# Altium PCB ADC-PCB.PcbDoc (part 2 of 2)
Units mil, origin at the board's own origin, x right, y up, seen from the top; angles counter-clockwise.
Board outline 3937.01 x 3937.01 mil, 2 copper layers (Top Layer, Bottom Layer); 145 components, 173 nets, 727 pads, 175 vias.
Unrouted connection lines stored in the file: 3.
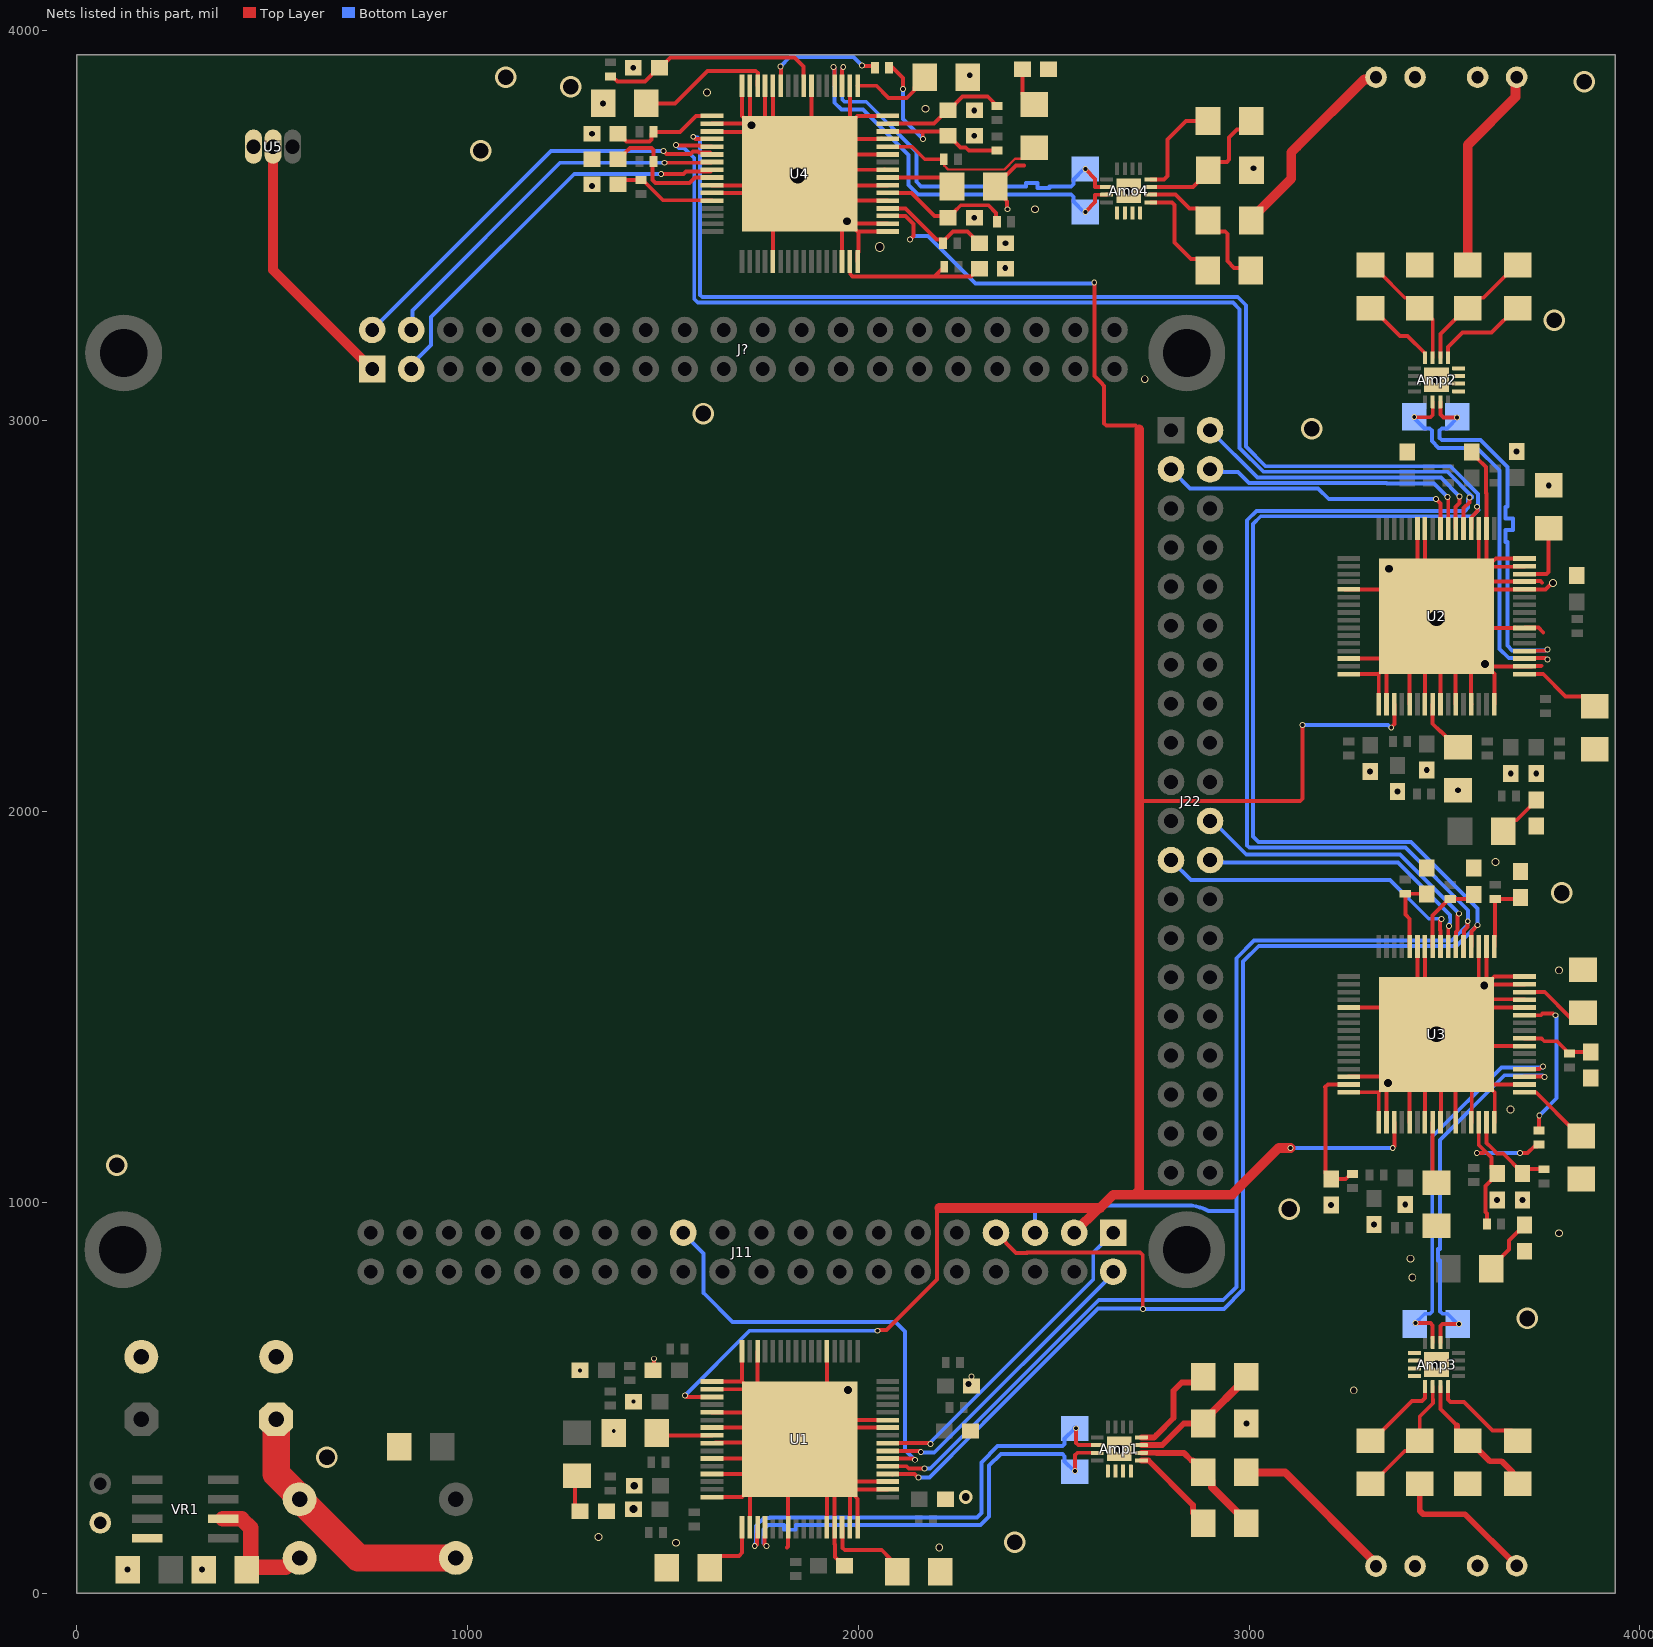
[diagram p2: the nets of this part, all layers, seen from the top]

## Via types
v1: diameter 15, hole 10, Top Layer to Bottom Layer, 98 vias
v2: diameter 20, hole 15, Top Layer to Bottom Layer, 43 vias
v3: diameter 55, hole 40, Top Layer to Bottom Layer, 16 vias
v4: diameter 35, hole 20, Top Layer to Bottom Layer, 12 vias
v5: diameter 25, hole 20, Top Layer to Bottom Layer, 3 vias
v6: diameter 30, hole 15, Top Layer to Bottom Layer, 1 vias
v7: diameter 50, hole 25, Top Layer to Bottom Layer, 1 vias
v8: diameter 20, hole 10, Top Layer to Bottom Layer, 1 vias

## Nets (pads, with @x,y where several pads share a name; then routed paths per layer and width w, separated by ;. In a path a pad name is that pad's centre, name@x,y a point inside that pad or via, vN(x,y) a via of type N, cw(c..) or ccw(c..) an arc to the next point about the centre after c; other vN are vias at no path point) (continued)
AD3-PIN14: C34.1 L26.1 L33.1 U3.14 | length 484.7
  Top Layer w10: v1(3583,1126) 3583.96,1126.96 3600.27,1126.96 3604.16,1130.84 ; U3.14@3588,1205 3588,1147 3604.16,1130.84 ; L26.1@3608.78,945 3608.78,971.22 3605,975 3605,1041.5 3635,1071.5 C34.1@3635,1073.46 3620.31,1088.15 3620.31,1114.69 3604.16,1130.84 ; v1(3694,1126) 3713,1126 3729.96,1142.96 3736.96,1142.96 L33.1@3742,1148
  Bottom Layer w10: v1(3583,1126) v1(3694,1126)
AD3-PIN15: C33.1 L25.1 U3.15 | length 238.5
  Top Layer w10: U3.15@3608,1205 3608,1152 3620,1140 3635.21,1124.79 3650.65,1124.79 3700,1075.43 C33.1@3700,1073.46 3711.54,1085 L25.1@3755,1085
AD3-PIN24: C39.1 L31.1 U3.24 | length 190.2
  Top Layer w10: U3.24@3705,1420 3748.18,1420 3755.68,1412.5 3788.72,1412.5 3810.63,1390.59 3810.63,1386.26 3815.67,1381.22 L31.1@3820,1381.22 3823.78,1385 C39.1@3875,1385
AD3-PIN27: L33.2 U3.27 | length 397.9
  Top Layer w10: U3.27@3705,1479 U3.27@3705,1479 3747.23,1479.05 3751.68,1483.5 3778.33,1483.5 3782.74,1479.09 v1(3784.09,1479.09) ; L33.2@3742,1184.22 3742,1207 3742.04,1207.04 3742.04,1221.04 v1(3743,1222)
  Bottom Layer w10: v1(3743,1222) 3787.5,1266.5 3787.5,1475.68 v1(3784.09,1479.09)
AD3-PIN33: C36.1 L28.1 U3.33 | length 219.7
  Top Layer w10: U3.33@3629,1656 U3.33@3628,1655 3628,1678 3630,1680 L28.1@3630,1776.89 3683.11,1776.89 3695,1765 C36.1@3695,1780 3686.54,1780 C36.1@3685,1778.46
AD3-PIN41: C40.1 L32.1 U3.41 | length 207.5
  Top Layer w10: U3.41@3470,1655 3470,1734.82 3483.68,1748.5 3505.63,1770.45 3505.63,1771.18 3510.67,1776.22 3562.68,1776.22 C40.1@3575,1788.54
AD3-PIN44: C37.1 L29.1 U3.44 | length 195.7
  Top Layer w10: U3.44@3411,1655 3411,1674 3410,1675 3411,1676 3411,1725.98 3400,1736.98 L29.1@3400,1790 3454.29,1790 C37.1@3455,1789.29
AD3-PIN63: C38.1 L30.1 U3.63 | length 364.5
  Top Layer w10: U3.63@3255,1302 3202,1302 3195,1295 3195.31,1294.69 3195.31,1074.69 C38.1@3210,1060 3247.56,1060 3260.67,1073.11 L30.1@3265,1073.11
AD4-PIN4: C44.1 L35.1 U4.4 | length 298
  Top Layer w10: U4.4@2075.39,3544 2121,3544 2200,3465 2210,3465 2210.63,3464.37 2211.85,3464.37 L35.1@2216.89,3459.33 ; L35.1@2216.89,3455 L35.1@2216.89,3459.33 ; C44.1@2310,3455 2308.03,3455 2293.35,3469.69 2293.35,3471.32 2279.67,3485 2242.56,3485 L35.1@2216.89,3459.33
AD4-PIN6: C47.1 L38.1 U4.6 | length 349.8
  Top Layer w10: U4.6@2075.39,3584 2136,3584 2195,3525 2225,3525 C47.1@2230,3520 2231.97,3520 2246.65,3534.69 2246.65,3536.65 2262.21,3552.21 2332.79,3552.21 2352.19,3532.81 2352.19,3512.81 L38.1@2355,3510
AD4-PIN12: L34.1 R30.2 U4.12 | length 425.6
  Top Layer w6: L34.1@2220,3660 2220,3653.51 2229.66,3643.85 2373.85,3643.85 2401.27,3671.27 2431.27,3671.27 R30.2@2450,3690
  Top Layer w10: U4.12@2075.39,3702 2138,3702 2170,3670 2215,3670 L34.1@2216.89,3671.89 ; L34.1@2218.78,3670 2220,3668.78 L34.1@2220,3660
AD4-PIN14: C46.1 L37.1 L44.1 U4.14 | length 544.5
  Top Layer w10: U4.14@2075.39,3741 2164,3741 ; L44.1@2079,3904 2080,3905 2088,3905 2114.75,3878.25 v1(2114.75,3849.5) ; v1(2166,3722) 2165.04,3722.96 2165.04,3739.96 2164,3741 ; L37.1@2355,3691.89 2283.11,3691.89 2275,3700 2261.97,3700 2231.97,3730 C46.1@2230,3730 2219,3741 2164,3741
  Bottom Layer w10: v1(2114.75,3849.5) 2114.75,3773.25 v1(2166,3722)
AD4-PIN15: C45.1 L36.1 U4.15 | length 318.9
  Top Layer w10: U4.15@2075.39,3761 2089,3761 2090,3760 2091,3761 2194.03,3761 2228.03,3795 C45.1@2230,3795 2231.97,3795 2266.97,3830 2331.22,3830 L36.1@2355,3806.22
AD4-PIN24: C51.1 L42.1 U4.24 | length 584.5
  Top Layer w10: L42.1@1366,3882 1370.33,3882 1383.33,3869 1453.96,3869 1488.96,3904 1492.9,3904 1518.9,3930 1837.14,3930 1860,3907.14 1860,3882 1861,3882 1860.39,3881.39 U4.24@1860.39,3858
AD4-PIN27: L44.2 U4.27 | length 293.4
  Top Layer w10: v1(1801,3907.5) 1801.82,3906.68 U4.27@1801.82,3885.5 ; U4.27@1801.39,3858 1801.39,3862 U4.27@1802.39,3863 ; v1(2009,3910) 2009.96,3909.04 2037.74,3909.04 L44.2@2042.78,3904 L44.2@2040.78,3902
  Bottom Layer w10: v1(1801,3907.5) 1824.65,3931.15 1987.85,3931.15 v1(2009,3910)
AD4-PIN33: C48.1 L39.1 U4.33 | length 284.3
  Top Layer w10: C48.1@1385,3735 1386.97,3735 1406.99,3714.98 1465.32,3714.98 1471.18,3720.83 1471.18,3734.96 L39.1@1476.22,3740 1544,3740 1585,3781 U4.33@1625.39,3781
AD4-PIN41: C52.1 L43.1 U4.41 | length 344.5
  Top Layer w10: C52.1@1385,3670 1386.97,3670 1401.65,3684.69 1401.65,3685.34 1415.31,3699 1470.36,3699 1476.22,3693.14 1476.22,3660.04 1473,3656.82 1473,3617.18 1480.68,3609.5 1568.32,3609.5 1581.82,3623 U4.41@1625.39,3623
AD4-PIN44: C49.1 L40.1 U4.44 | length 267
  Top Layer w10: C49.1@1384.93,3606 1387,3606 1398,3617 1448.33,3617 1500.33,3565 1624.39,3565 U4.44@1625.39,3564
AD4-PIN63: C50.1 L41.1 U4.63 | length 409.2
  Top Layer w10: U4.63@1978.39,3408 1979.39,3407 1979.39,3375.86 1985.25,3370 2195,3370 ; L41.1@2220,3395 2195,3370 ; C50.1@2310,3390 2308.03,3390 2288.03,3370 2195,3370
CS-1: J11.1 U1.40 | length 844.6
  Top Layer w10: U1.40@2075.39,383.7 2183.3,383.7 v1(2185,382)
  Bottom Layer w10: v1(2185,382) 2185,386.06 2601.34,802.4 2601.34,871.7 2623.34,893.7 J11.1@2652.34,922.7
CS-2: J22.3 U2.40 | length 790.1
  Top Layer w10: v1(3479,2800) 3489.79,2789.21 3489.79,2725.21 U2.40@3490,2725
  Bottom Layer w10: J22.3@2800.34,2876.2 2806,2870.54 2806,2870 2806.54,2870 2849.34,2827.2 3176.97,2827.2 3204.17,2800 v1(3479,2800)
CS-3: J22.23 U3.40 | length 828
  Top Layer w10: U3.40@3490,1655 3490,1696.68 3489,1697.68 3489,1720.65 3492.62,1724.27 v1(3492.62,1725.62)
  Bottom Layer w10: J22.23@2800.34,1876.2 2801.8,1876.2 2802,1876 2802,1874.54 2851.34,1825.2 3360.8,1825.2 3460,1726 3492.24,1726 v1(3492.62,1725.62)
CS-4: J?.3 U4.40 | length 1028.8
  Top Layer w10: v1(1495.5,3632) 1552.35,3632 1559.35,3639 1621.39,3639 U4.40@1625.39,3643
  Bottom Layer w10: J?.3@855.64,3133 855.64,3143.64 906.64,3194.64 906.64,3265.64 1273,3632 v1(1495.5,3632)
DRDY-1: J11.23 U1.38 | length 1145.4
  Top Layer w10: U1.38@2075.39,344.7 2140.15,344.7 2143.65,341.2 v1(2145,341.2)
  Bottom Layer w10: J11.23@1552.34,922.7 1557.3,922.7 1562,918 1562,911 1601.07,871.93 1604,869 1604,830.72 ccw(c1652.34,822.7) 1604,814.68 1604,768 1606.93,765.07 1678,694 2095.14,694 2119.59,669.55 2119.59,366.61 v1(2145,341.2)
DRDY-2: J22.2 U2.38 | length 794.9
  Top Layer w10: U2.38@3529,2725 3529,2780 3539,2790 v1(3539,2807)
  Bottom Layer w10: J22.2@2900.34,2976.2 3021.47,2855.07 3490.93,2855.07 v1(3539,2807)
DRDY-3: J22.22 U3.38 | length 824
  Top Layer w10: U3.38@3529,1655 3530,1656 3530,1692.68 3534,1696.68 3534,1734.3 3537.27,1737.56 v1(3537.27,1738.91)
  Bottom Layer w10: J22.22@2900.34,1976.2 2907.8,1976.2 2923,1961 2922.52,1960.52 2993,1890 3386.94,1890 3537.27,1739.68 v1(3537.27,1738.91)
DRDY-4: J?.2 U4.38 | length 1073.9
  Top Layer w10: v1(1501.5,3691) 1502,3691 1509.5,3683.5 1570.5,3683.5 1576.58,3689.58 1590.17,3689.58 1592.69,3687.06 1620.33,3687.06 U4.38@1625.39,3682
  Bottom Layer w10: J?.2@755.64,3233 755.64,3242.64 756,3243 765.64,3243 1213.64,3691 v1(1501.5,3691)
ds1820: J?.1 U5.2 | length 674.1
  Top Layer w25: U5.2@502,3702.07 502,3386.64 J?.1@755.64,3133
GND: Amo4.13 Amo4.14 Amo4.15 Amo4.16 Amo4.17 Amp1.13 Amp1.14 Amp1.15 Amp1.16 Amp1.17 Amp2.13 Amp2.14 Amp2.15 Amp2.16 Amp2.17 Amp3.13 Amp3.14 Amp3.15 Amp3.16 Amp3.17 C1.b C2.b C3.1 C4.1 C5.2 C6.2 C7.2 C8.2 C9.2 C10.2 C11.2 C12.2 C13.2 C14.2 C15.2 C16.2 C17.2 C18.1 C19.2 C20.2 C21.2 C22.2 C23.2 C24.2 C25.2 C26.2 C27.2 C28.1 C29.2 C30.1 C31.1 C32.2 C33.2 C34.2 C35.2 C36.2 C37.2 C38.2 C39.2 C40.2 C41.2 C42.1 C43.1 C44.2 C45.2 C46.2 C47.2 C48.2 C49.2 C50.2 C51.2 C52.2 C53.2 J1.1 J2.1 J3.1 J4.1 J5.1 R2.1 R6.2 R13.1 R15.2 R20.1 R25.1 R27.2 R29.2 U1.1 U1.2 U1.5 U1.7 U1.9 U1.11 U1.13 U1.16 U1.18 U1.23 U1.28 U1.29 U1.31 U1.32 U1.34 U1.35 U1.42 U1.43 U1.53 U1.62 U1.64 U1.65 U2.1 U2.2 U2.5 U2.7 U2.9 U2.11 U2.13 U2.16 U2.18 U2.23 U2.28 U2.29 U2.31 U2.32 U2.34 U2.35 U2.42 U2.43 U2.53 U2.62 U2.64 U2.65 U3.1 U3.2 U3.5 U3.7 U3.9 U3.11 U3.13 U3.16 U3.18 U3.23 U3.28 U3.29 U3.31 U3.32 U3.34 U3.35 U3.42 U3.43 U3.53 U3.62 U3.64 U3.65 U4.1 U4.2 U4.5 U4.7 U4.9 U4.11 U4.13 U4.16 U4.18 U4.23 U4.28 U4.29 U4.31 U4.32 U4.34 U4.35 U4.42 U4.43 U4.53 U4.62 U4.64 U4.65 U5.1 VR1.4 | length 15419
  Top Layer w10: C3.1@1374.02,410 v1(1374.02,415) ; C12.2@1475,570 1477,572 v1(1477,600) ; U1.16@1625.39,245.7 1644,245.7 1645,246.7 1646,245.7 1702.39,245.7 U1.65@1720,263.31 ; U1.13@1625.39,304.7 1720,304.7 U1.65@1760,344.7 ; U1.11@1625.39,344.7 U1.65@1760,344.7 ; U1.9@1625.39,383.7 1634,383.7 1635,384.7 1635,385 U1.65@1841.69,385 ; U1.7@1625.39,423.7 U1.65@1751.3,423.7 ; U1.5@1625.39,462.7 1707.89,462.7 1710,464.81 1710,465 U1.65@1751.3,423.7 ; U1.2@1625.39,521.7 U1.65@1722.39,521.7 ; U1.1@1625.39,541.7 1702.39,541.7 ; U4.43@1625.39,3584 U4.65@1801.39,3584 ; U4.42@1625.39,3603 U4.65@1820.39,3603 ; U4.35@1625.39,3741 1626.39,3740 U4.65@1743.39,3740 ; U4.34@1625.39,3761 U4.65@1722.39,3761 ; U1.64@1702.39,618.7 1702.39,541.7 ; U4.32@1702.39,3858 1702.39,3781 U4.65@1722.39,3761 ; U1.18@1722.39,168.7 1722.39,247.61 1720,250 U1.65@1720,263.31 ; U4.31@1722.39,3858 1722.39,3845.61 1723,3845 1722.39,3844.39 U4.65@1722.39,3761 ; U1.65@1740,504.09 U1.65@1722.39,521.7 ; U1.62@1742.39,618.7 1742.39,501.7 U1.65@1850.39,393.7 ; U4.29@1761.39,3858 U4.65@1761.39,3722 ; U4.53@1781.39,3408 1781.39,3425.39 1782,3426 1781.39,3426.61 1781.39,3564 U4.65@1801.39,3584 ; U4.28@1781.39,3858 U4.65@1781.39,3702 ; 1818,117 1820.39,119.39 1820.39,144.7 1820.09,145 1820,145 1820.39,145.39 U1.23@1820.39,168.7 1820.39,280 1850.39,310 U1.65@1850.39,393.7 ; U4.23@1880.39,3858 U4.65@1880.39,3663 ; U1.28@1919.39,168.7 U1.65@1919.39,324.7 ; U1.53@1919.39,618.7 1919.39,462.7 U1.65@1899.39,442.7 ; U4.65@1956,3527.39 U4.65@1919.39,3564 ; U4.62@1958.39,3408 U4.65@1958.39,3525 ; C13.2@1965,70 1963.03,70 1940.71,92.32 1940.71,124.38 1939.39,125.7 U1.29@1939.39,168.7 1939.39,184.39 1940,185 1939.39,185.61 U1.65@1939.39,304.7 ; U1.31@1978.39,168.7 U1.65@1978.39,265.7 ; U4.18@1978.39,3858 U4.65@1978.39,3761 ; U1.32@1998.39,168.7 1998.39,241.61 1990,250 1990,254.09 U1.65@1978.39,265.7 ; U4.64@1998.39,3408 1998.39,3431 2000,3432.61 2000,3483.39 ; U1.34@2075.39,265.7 U1.65@1978.39,265.7 ; U1.35@2075.39,285.7 2055.7,285.7 2055,285 2054.3,285.7 U1.65@1958.39,285.7 ; U1.42@2075.39,423.7 U1.65@1880.39,423.7 ; U1.43@2075.39,442.7 U1.65@1899.39,442.7 ; U4.1@2075.39,3485 1998.39,3485 U4.65@1978.39,3505 ; U4.2@2075.39,3505 U4.65@1978.39,3505 ; U4.5@2075.39,3564 U4.65@1919.39,3564 ; U4.7@2075.39,3603 2061,3603 2060,3604 2059,3603 U4.65@1880.39,3603 ; U4.9@2075.39,3643 2068,3643 2067,3644 2066,3643 U4.65@1860.39,3643 ; U4.11@2075.39,3682 U4.65@1899.39,3682 ; U4.13@2075.39,3722 2060,3722 2059,3723 2058,3722 U4.65@1939.39,3722 ; U4.16@2075.39,3781 1998.39,3781 U4.65@1978.39,3761 ; C14.2@2277,405.07 C14.2@2286.93,415 ; C11.2@2290,530 v1(2290,554) ; v1(2382,3542) 2381.04,3542.96 2381.04,3561.96 2376.61,3566.39 2376.61,3569.57 2372.18,3574 2369,3574 2350.12,3592.88 C42.1@2350.12,3600 2350.12,3603.94 2376.61,3630.43 2380.55,3630.43 2404.12,3654 2424,3654 ; U2.53@3245,2568 3246,2569 U2.53@3255,2569 3411,2569 U2.65@3431,2549 ; U3.64@3255,1282 3332,1282 ; U3.62@3255,1322 U3.65@3372,1322 ; U3.53@3255,1499 3411,1499 U3.65@3431,1479 ; U2.64@3255,2352 3332,2352 ; U2.62@3255,2392 U2.65@3372,2392 ; U3.1@3332,1205 3332,1282 ; U2.1@3332,2275 3332,2352 ; U3.2@3352,1205 U3.65@3352,1302 ; U2.2@3352,2275 U2.65@3352,2372 ; U3.65@3374,1324 U3.65@3411,1361 ; U3.5@3411,1205 U3.65@3411,1361 ; U2.5@3411,2275 U2.65@3411,2431 ; U3.43@3431,1655 U3.65@3431,1479 ; U2.43@3431,2725 U2.65@3431,2549 ; U3.7@3450,1205 U3.65@3450,1400 ; U3.42@3450,1655 U3.65@3450,1460 ; U2.7@3450,2275 3450,2357.5 3449.5,2358 3449,2358 3480,2389 U2.65@3480,2500 ; U2.42@3450,2725 U2.65@3450,2530 ; U3.9@3490,1205 3491,1206 U3.65@3491,1419 ; U2.9@3490,2275 3490,2354 3488,2356 U2.65@3488,2492 ; U3.11@3529,1205 3529,1227 3528,1228 3529,1229 U3.65@3529,1381 ; U2.11@3529,2275 3529,2356 3528,2357 U2.65@3528,2452 ; U3.13@3569,1205 3570,1206 U3.65@3570,1340 ; U2.13@3569,2275 3568,2276 U2.65@3568,2412 ; C27.2@3570,2920.46 3570,2918 3582,2906 3582.5,2906 3606.69,2881.8 3606.69,2816.06 3608,2814.75 U2.34@3608,2725 U2.65@3608,2628 ; U3.35@3588,1655 U3.65@3588,1538 ; U2.35@3588,2725 U2.65@3588,2608 ; U3.34@3608,1655 U3.65@3608,1558 ; U3.16@3628,1205 3629,1206 3629,1281 U3.65@3608,1302 ; U2.16@3628,2275 3628,2352 U2.65@3608,2372 ; U3.18@3705,1302 U3.65@3608,1302 ; U3.23@3705,1400 U3.65@3510,1400 ; U3.28@3705,1499 U3.65@3549,1499 ; U3.29@3705,1519 3704,1520 U3.65@3570,1520 ; U3.31@3705,1558 U3.65@3608,1558 ; U3.32@3705,1578 3628,1578 U3.65@3608,1558 ; U2.31@3705,2628 3704,2627 3607,2627 U2.65@3588,2608 ; U2.32@3705,2648 3632,2648 3626.5,2642.5 3622.5,2642.5 U2.65@3608,2628 ; 3748.41,2373.45 3747.96,2373 3724,2373 3723,2372 U2.18@3705,2372 U2.65@3608,2372 ; 3750,2586 3746,2590 3706,2590 U2.29@3705,2589 U2.65@3569,2589 ; 3753,2459 3741,2471 3706,2471 U2.23@3705,2470 3682,2470 3681,2471 3681,2470 U2.65@3510,2470 ; v2(3778,2585) 3775.29,2585 3759.29,2569 3722,2569 3721,2570 3720,2569 U2.28@3705,2569 3622.5,2569 3621,2567.5 3621,2565 3556,2500 U2.65@3480,2500 ; 1702.39,541.7 U1.65@1722.39,521.7 ; U1.65@1720,263.31 U1.65@1801.39,344.7 ; U4.65@1722.39,3761 U4.65@1743.39,3740 ; U4.65@1743.39,3740 U4.65@1761.39,3722 ; U1.65@1751.3,423.7 1781.3,393.7 U1.65@1850.39,393.7 ; U1.65@1760,344.7 U1.65@1801.39,344.7 ; U4.65@1761.39,3722 U4.65@1781.39,3702 ; U4.65@1781.39,3702 U4.65@1850.39,3633 ; U1.65@1801.39,344.7 U1.65@1841.69,385 ; U4.65@1801.39,3584 U4.65@1820.39,3603 ; U4.65@1820.39,3603 U4.65@1850.39,3633 ; U1.65@1841.69,385 U1.65@1850.39,393.7 ; U1.65@1850.39,393.7 U1.65@1880.39,423.7 ; U1.65@1850.39,393.7 U1.65@1919.39,324.7 ; U4.65@1850.39,3633 U4.65@1860.39,3643 ; U4.65@1850.39,3633 U4.65@1880.39,3603 ; U4.65@1860.39,3643 U4.65@1880.39,3663 ; U1.65@1880.39,423.7 U1.65@1899.39,442.7 ; U4.65@1880.39,3603 U4.65@1919.39,3564 ; U4.65@1880.39,3663 U4.65@1899.39,3682 ; U4.65@1899.39,3682 U4.65@1939.39,3722 ; U1.65@1919.39,324.7 U1.65@1939.39,304.7 ; U4.65@1919.39,3564 U4.65@1958.39,3525 ; U1.65@1939.39,304.7 U1.65@1958.39,285.7 ; U4.65@1939.39,3722 U4.65@1978.39,3761 ; U1.65@1958.39,285.7 U1.65@1978.39,265.7 ; U4.65@1958.39,3525 U4.65@1978.39,3505 ; 3332,1282 U3.65@3352,1302 ; 3332,2352 U2.65@3352,2372 ; U3.65@3352,1302 U3.65@3411,1361 ; U2.65@3352,2372 U2.65@3372,2392 ; U2.65@3372,2392 U2.65@3411,2431 ; U3.65@3411,1361 U3.65@3450,1400 ; U2.65@3411,2431 U2.65@3480,2500 ; U3.65@3431,1479 U3.65@3450,1460 ; U2.65@3431,2549 U2.65@3450,2530 ; U3.65@3450,1400 v3(3480,1430) ; U3.65@3450,1460 v3(3480,1430) ; U2.65@3450,2530 U2.65@3480,2500 ; v3(3480,1430) U3.65@3549,1499 ; v3(3480,1430) U3.65@3491,1419 ; U2.65@3480,2500 U2.65@3488,2492 ; U2.65@3480,2500 U2.65@3569,2589 ; U2.65@3488,2492 U2.65@3510,2470 ; U3.65@3491,1419 U3.65@3510,1400 ; U3.65@3510,1400 U3.65@3529,1381 ; U2.65@3510,2470 U2.65@3528,2452 ; U2.65@3528,2452 U2.65@3568,2412 ; U3.65@3529,1381 U3.65@3570,1340 ; U3.65@3549,1499 U3.65@3570,1520 ; U2.65@3568,2412 U2.65@3608,2372 ; U2.65@3569,2589 U2.65@3588,2608 ; U3.65@3570,1340 U3.65@3608,1302 ; U3.65@3570,1520 U3.65@3588,1538 ; U3.65@3588,1538 U3.65@3608,1558 ; U2.65@3588,2608 U2.65@3608,2628
  other v1: 1425.04,490 1288.07,570
  other v2: 130,60 320,60 2207,117 1533,129 1335,144 2993.24,434 3268,519 2282,535 3418,808 3413,856 3793,921 3320,943.07 3210,993.07 3400,995 3635,1006.54 3700,1006.54 3669,1238 3793,1594 3631,1871 3380,2051.54 3535,2055 3670,2098.07 3735,2098.07 3310,2103.07 3455,2106.54 3767,2835.24 3685,2921.93 2733,3107 2376,3392 2376.93,3455 2296.93,3520 2452,3542 1318,3601 3011.24,3647 2296.93,3730 1318.07,3735 2296.93,3795 2172,3799 1346.76,3813 1613,3841 2285.24,3885 1424,3904
  other v3: 2400,130 640,348 3712,703 3103,983 102,1095 3800,1792 3480,2495 3161,2980 1603,3019 3781,3258 1845.39,3628 1034,3692 1264,3855 3858,3868 1098,3880
  other v4: 2275,246 2668,369 1974,520 3480,585 3356,1306 3602,1555 3604,2378 3358,2622 3480,3105.39 1971,3511 2692,3589 1727,3757
  other v5: 1425,215 1426.54,275 2055,3445
IN1+: J1.2 R1.1 | length 459.3
  Top Layer w20: R1.1@3010.24,292 R1.1@2993.24,309 3092,309 3325,76 J1.2@3325,69
IN2+: J2.2 R11.1 | length 532.5
  Top Layer w25: R11.1@3560,3399.24 3560,3707 3682,3829 3682,3877 J2.2@3685,3880
IN3+: J3.2 R18.1 | length 375.5
  Top Layer w15: R18.1@3437.01,280 3437.01,210.79 3445.79,202 3553,202 J3.2@3685,70
IN4+: J4.2 R23.1 | length 513.7
  Top Layer w25: R23.1@3005.24,3513 3005.24,3516.94 3108,3619.7 3108,3687.36 3122.64,3702 3294.88,3874.24 3319.24,3874.24 J4.2@3325,3880
MCLK: J11.3 U1.3 U2.3 U3.3 U4.3 | length 6388.6
  Top Layer w10: v1(1556,506) 1557.35,506 1561.65,501.7 U1.3@1625.39,501.7 ; v1(2049,671.5) 2049.96,672.46 2053.49,672.46 2054.04,673 2071.94,673 2201.34,802.4 2201.34,980.14 2207.2,986 ; U4.3@2075.39,3525 2120.29,3525 2141,3504.29 2141,3473.82 2132.09,3464.91 v1(2132.09,3464.09) ; v1(2604,3354) 2604.64,3353.36 2604.64,3114.7 2620.99,3098.35 2629.34,3090 2629.34,2993.86 2635.2,2988 2710,2988 2719,2979 ; 2615.64,986 2619,986 ; 2719,2037 2728.8,2027.2 3131.14,2027.2 3137,2033.06 v1(3137,2222) ; v1(3364,2215) 3364,2216.35 3372,2224.35 U2.3@3372,2275 ; v1(3368,1139) 3368,1140.35 3372,1144.35 U3.3@3372,1205
  Top Layer w25: 2207.2,986 2615.64,986 J11.3@2552.34,922.7 ; 2619,986 2652.7,1019.7 2708.06,1019.7 ; 2719,2979 2719,2037 2719,2027.2 2719,1030.64 2708.06,1019.7 ; v1(3106,1139) 3076,1139 2956.7,1019.7 2719,1019.7 2708.06,1019.7
  Bottom Layer w10: v1(1556,506) 1721.5,671.5 v1(2049,671.5) ; v1(2132.09,3464.09) 2132.91,3464.09 2141.82,3473 2178,3473 2299.5,3351.5 2601.5,3351.5 v1(2604,3354) ; v1(3106,1139) v1(3368,1139) ; v1(3137,2222) 3355.65,2222 3362.65,2215 v1(3364,2215)
NetAmo4_1: Amo4.1 R22.2 | length 276.1
  Top Layer w10: Amo4.1@2748.5,3559.47 2802.53,3559.47 2809,3553 2809,3457 2851,3415 2867.5,3415 2894,3388.5 R22.2@2894,3385
NetAmo4_2: Amo4.2 R22.1 R23.2 | length 380.4
  Top Layer w10: Amo4.2@2748.5,3579.16 2811.84,3579.16 2847.57,3543.43 2868.5,3543.43 2895,3516.94 R23.2@2895,3513 2913,3495 2913,3493.5 2921.5,3485 2939.14,3485 2945,3479.14 2945,3409 2962,3392 2997.24,3392 R22.1@3004.24,3385
NetAmo4_3: Amo4.3 R25.2 R26.1 | length 362.5
  Top Layer w10: Amo4.3@2748.5,3598.84 2856.78,3598.84 2896,3638.06 R25.2@2896,3642 2917.14,3663.14 2943.14,3663.14 2949,3669 2949,3726 2969,3746 2983.24,3746 R26.1@3005.24,3768
NetAmo4_4: Amo4.4 R26.2 | length 262.9
  Top Layer w10: Amo4.4@2748.5,3618.53 2782.53,3618.53 2791,3627 2791,3720 2839,3768 R26.2@2895,3768
NetAmp1_1: Amp1.1 R3.2 | length 236.6
  Top Layer w15: Amp1.1@2724.5,339.47 2724.61,339.35 2742.65,339.35 2856.27,225.73 2856.27,205.5 R3.2@2882.76,179
NetAmp1_2: Amp1.2 R1.2 R3.1 | length 374.8
  Top Layer w10: R3.1@2993,179 2996,182 R3.1@3010,182
  Top Layer w15: Amp1.2@2724.5,359.16 2762.84,359.16 2763,359 2833,359 2852.57,339.43 2856.5,339.43 2883,312.94 R1.2@2883,309
  Top Layer w20: R1.2@2883,309 2904.5,287.5 2904.5,271.44 2993.94,182 R3.1@2996,182
NetAmp1_3: Amp1.3 R2.2 R4.1 | length 371.2
  Top Layer w10: R4.1@2993.24,554 2993.24,538.76 R4.1@3002,530
  Top Layer w15: Amp1.3@2724.5,378.84 2777.84,378.84 2833,434 R2.2@2883,434
  Top Layer w20: R2.2@2883,434 2904.5,455.5 2904.5,461.32 2973.17,530 R4.1@3002,530
NetAmp1_4: Amp1.4 R4.2 | length 263.7
  Top Layer w15: Amp1.4@2724.5,398.53 2757.14,398.53 2763,404.39 2806.97,448.35 2806.97,517.97 2828,539 2868,539 R4.2@2883,554
NetAmp2_1: Amp2.1 R10.2 | length 247.3
  Top Layer w10: Amp2.1@3509.53,3161.89 3509.53,3189.53 3546.02,3226.02 3621.08,3226.02 3684.06,3289 R10.2@3688,3289
NetAmp2_2: Amp2.2 R10.1 R11.2 | length 332.1
  Top Layer w10: Amp2.2@3489.84,3161.89 3489.84,3222.78 3582.56,3315.5 3600.32,3315.5 3684.06,3399.24 R10.1@3688,3399.24
NetAmp2_3: Amp2.3 R13.2 R14.1 | length 315
  Top Layer w10: R14.1@3311,3399.24 3311,3399 3328,3382 3332.17,3382 3398.68,3315.5 3410.5,3315.5 R13.2@3437,3289 3440.94,3289 3470.16,3259.78 Amp2.3@3470.16,3161.89
NetAmp2_4: Amp2.4 R14.2 | length 198.8
  Top Layer w10: R14.2@3311,3289 3314.94,3289 3385.97,3217.96 3405.82,3217.96 3450.35,3173.43 3450.35,3162.01 Amp2.4@3450.47,3161.89
NetAmp3_1: Amp3.1 R17.2 | length 221
  Top Layer w10: R17.2@3310.98,390.24 3310.98,399.02 3310,400 3324.69,400 3416.69,492 3443.14,492 3450.35,499.21 3450.35,528.39 Amp3.1@3450.47,528.5
NetAmp3_2: Amp3.2 R17.1 R18.2 | length 324.4
  Top Layer w10: R17.1@3310.98,280 3314.92,280 3398.66,363.74 3410.51,363.74 R18.2@3437.01,390.24 3437.01,452.01 3471,486 3471,496.24 3470.28,496.97 3470.28,528.39 Amp3.2@3470.16,528.5
NetAmp3_3: Amp3.3 R20.2 R21.1 | length 353.2
  Top Layer w10: Amp3.3@3489.84,528.5 3489.84,471.16 3532.07,428.93
  Top Layer w15: 3532.07,428.93 3532.07,414 3556.06,390 R20.2@3560,390 3563.94,390 3616.33,337.61 3646.6,337.61 3675,309.21 3675,292.76 R21.1@3687.99,279.76
NetAmp3_4: Amp3.4 R21.2 | length 262.7
  Top Layer w10: Amp3.4@3509.53,528.5 3509.53,495.47 3516,489 3550.53,489 3623.03,416.5 3671.5,416.5 R21.2@3690,398
  Top Layer w15: R21.2@3687.99,390 3687.99,395.99 R21.2@3690,398
NetC2_a: C2.a R8.2 R9.1 | length 692
  Top Layer w70: C2.a@510,445 510,305 575,240 575,235 720,90 R8.2@970,90
NetC3_2: C3.2 U1.8 | length 143.8
  Top Layer w10: C3.2@1484.25,410 1490.45,403.8 1625.29,403.8 U1.8@1625.39,403.7
NetC4_2: C4.2 U1.30 | length 227.8
  Top Layer w10: U1.30@1958.39,168.7 1959.39,167.7 1959.39,115.86 1965.25,110 2060,110 2080,90 2080,74.76 C4.2@2099.76,55
NetC8_1: C8.1 R7.1 | length 97.5
  Top Layer w10: R7.1@1280,300 1275,295 1275,223.07 C8.1@1288.07,210
NetC16_1: C16.1 R8.1 VR1.6 | length 324.3
  Top Layer w40: VR1.6@374,190 421.57,190 445,166.57 445,69.76 C16.1@435.24,60 ; C16.1@446.73,66.65 534.03,66.65 557.39,90 R8.1@570,90
NetC18_2: C18.2 U2.8 | length 139.8
  Top Layer w10: U2.8@3470,2275 3470,2225 3490,2205 3491.3,2205 3531.06,2165.24 C18.2@3535,2165.24
NetC28_2: C28.2 U2.30 | length 175.6
  Top Layer w10: U2.30@3705,2608 3761.14,2608 3767,2613.86 C28.2@3767,2725
NetC29_1: C29.1 R16.1 | length 120
  Top Layer w10: R16.1@3650.24,1950 3650.24,1951.54 3676.73,1978.03 3685,1978.03 3735,2028.03 C29.1@3735,2030
NetC30_2: C30.2 U3.8 | length 158.9
  Top Layer w10: U3.8@3470,1205 3470,1060.24 C30.2@3480,1050.24
NetC31_2: C31.2 U3.30 | length 180.2
  Top Layer w10: U3.30@3705,1538 3757,1538 3820,1475 3845,1475 C31.2@3855,1485
NetC41_1: C41.1 R28.1 | length 148.2
  Top Layer w10: R28.1@3620.12,830 3620.12,833.94 3665.82,879.63 3665.82,902.74 3688.35,925.28 3690.31,925.28 3705,939.96 C41.1@3705,941.93
NetC42_2: C42.2 U4.8 | length 180.7
  Top Layer w10: U4.8@2075.39,3623 2213.39,3623 2215,3621.39 2215,3610 2225,3600 C42.2@2239.88,3600
NetC43_2: C43.2 U4.30 | length 355.5
  Top Layer w10: C43.2@1457,3813 1531,3813 1614,3896 1737.14,3896 1743,3890.14 1743,3871 1742,3870 1742.39,3869.61 U4.30@1742.39,3858
NetC53_1: C53.1 R30.1 | length 104.5
  Top Layer w10: C53.1@2420,3900 2420,3836.5 2446.5,3810 R30.1@2450,3810
NetR6_1: R6.1 U1.17 | length 169.5
  Top Layer w10: R6.1@1635,90 1640,95 1694.14,95 1702.39,103.25 U1.17@1702.39,168.7
  Top Layer w15: R6.1@1620,65 1620,75 R6.1@1635,90
NetR15_1: R15.1 U2.17 | length 214
  Top Layer w10: U2.17@3705,2352 3753,2352 3810,2295 3860,2295 R15.1@3885,2270
NetR27_1: R27.1 U3.17 | length 191.4
  Top Layer w10: U3.17@3705,1282 3734.06,1282 3836.06,1180 3840,1180 R27.1@3850,1170
NetR29_1: R29.1 U4.17 | length 210.5
  Top Layer w10: U4.17@1998.39,3858 2046.23,3858 2077.23,3827 2124.07,3827 2143.5,3846.44 2143.5,3853.5 R29.1@2170,3880
OUT1_N: Amp1.11 R5.1 U1.20 | length 1200.6
  Top Layer w10: U1.20@1761.39,168.7 1761.39,145.7 1759.45,143.75 1759.45,124.7 1763.71,120.44 v1(1764.89,120.44) ; v1(2555,313) 2555,353.3 2560.86,359.16 Amp1.11@2611.5,359.16
  Bottom Layer w10: v1(1764.89,120.44) 1764.57,120.44 1757.5,127.51 1757.5,163.14 1768.36,174 1774,174 1775,174 1810,174 1810,162.22 1840,162.22 1840,174 1864,174 2312.43,174 2335,196.57 2335,326.12 2365,356.12 2522.19,356.12 2528.05,350.26 2528.05,336.95 R5.1@2554,311
  Bottom Layer w15: R5.1@2554,313 v1(2555,313)
OUT1_P: Amp1.10 R5.2 U1.19 | length 1205.2
  Top Layer w10: v1(1735,120.44) 1736.18,120.44 1740.45,124.7 1740.45,151.62 1742.39,153.57 U1.19@1742.39,168.7 ; v1(2557,422) 2557,384.7 2562.86,378.84 Amp1.10@2611.5,378.84
  Bottom Layer w10: v1(1735,120.44) 1735.96,121.39 1735.96,125.96 1737.5,127.51 1737.5,171.43 1758.77,192.7 1772.32,192.7 1773.62,194 2304.14,194 2315,204.86 2315,334.4 2356.72,376.12 2522.19,376.12 2528.05,381.98 2528.05,395.28 R5.2@2554,421.24
  Bottom Layer w15: R5.2@2554,421.24 2556.24,421.24 v1(2557,422)
OUT2_N: Amp2.11 R12.1 U2.20 | length 1038.1
  Top Layer w10: Amp2.11@3489.84,3048.9 3489.84,3037.48 3489.96,3037.36 3490.04,3037.36 3490.04,3016.96 3498,3009 v1(3532,3009) ; U2.20@3705,2411 3705.93,2411.93 3759.08,2411.93 3762.65,2415.5 v1(3764,2415.5)
  Bottom Layer w10: R12.1@3533,3011 3533,3007.5 3506.5,2981 3493.74,2981 3487.88,2975.14 3487.88,2956.87 3493.74,2951.01 3592.28,2951.01 3661.14,2882.14 3661.14,2813 3661.14,2780.54 3656.14,2780.54 3656.14,2750.54 3675.85,2750.54 3675.85,2720.54 3656.14,2720.54 3656.14,2690.54 3661.14,2690.54 3661.14,2687.54 3661.14,2685.54 3661.14,2425 3673.14,2413 3761.5,2413 v1(3764,2415.5)
OUT2_P: Amp2.10 R12.2 U2.19 | length 1035.6
  Top Layer w10: v1(3423,3010) 3423.5,3009.5 3464.3,3009.5 3470.16,3015.36 Amp2.10@3470.16,3048.9 ; U2.19@3705,2392 3728.07,2392 3729,2392.93 3759.4,2392.93 3762.97,2389.36 v1(3764.32,2389.36)
  Bottom Layer w10: v1(3423,3010) 3425,3010 3426,3011 R12.2@3422.76,3011 3422.76,3007.5 3449.26,2981 3462.02,2981 3467.88,2975.14 3467.88,2948.58 3485.46,2931.01 3583.99,2931.01 3641.14,2873.86 3641.14,2813 3641.14,2416.72 3664.86,2393 3760.15,2393 3763.78,2389.36 v1(3764.32,2389.36)
OUT3_N: Amp3.11 R19.1 U3.20 | length 1009.9
  Top Layer w10: v1(3426,691) 3463.98,691 3469.84,685.14 3469.84,653.03 3470.04,653.03 3470.16,652.91 Amp3.11@3470.16,641.5 ; U3.20@3705,1341 3743.83,1341 3750.83,1348 v1(3752,1348)
  Bottom Layer w10: v1(3426,691) 3427,691 3425,689 R19.1@3423.76,689 3449.72,714.95 3463.02,714.95 3468.88,720.81 3468.88,1168.28 3646.1,1345.5 3752,1345.5 v1(3752,1348)
OUT3_P: Amp3.10 R19.2 U3.19 | length 1010.3
  Top Layer w10: Amp3.10@3489.84,641.5 3489.84,683.14 3495.7,689 v1(3537,689) ; U3.19@3705,1322 3753.34,1322 3754.78,1320.57 v1(3756.13,1320.57)
  Bottom Layer w10: v1(3537,689) 3536,688 3536,687 R19.2@3534,689 3508.05,714.95 3494.74,714.95 3488.88,720.81 3488.88,846 3488.88,851 3483.88,851 3483.88,881 3488.88,881 3488.88,889 3488.88,924 3497.28,924 3497.28,954 3488.88,954 3488.88,978.11 3488.88,1160 3654.38,1325.5 3751.15,1325.5 v1(3756.13,1320.57)
OUT4_N: Amo4.11 R24.1 U4.20 | length 1032.1
  Top Layer w10: v1(1936.39,3906) 1938.89,3903.5 1938.89,3858.5 U4.20@1939.39,3858 ; v1(2581,3534.76) 2606.28,3560.05 2606.28,3579 2635.35,3579 Amo4.11@2635.5,3579.16
  Bottom Layer w10: v1(1936.39,3906) 1936.39,3904.65 1938.89,3902.15 1938.89,3814.57 1956.47,3797 2012,3797 2128.5,3680.5 2128.5,3603.92 2152.42,3580 2544.59,3580 2550.57,3574.02 2550.57,3561.26 R24.1@2577.06,3534.76
OUT4_P: Amo4.10 R24.2 U4.19 | length 1031.2
  Top Layer w10: U4.19@1958.39,3858 1958.39,3895.79 1958.89,3896.29 1958.89,3903.5 v1(1961.39,3906) ; v1(2581,3645) 2606.28,3619.72 2606.28,3599 2610.02,3599 2610.18,3598.84 Amo4.10@2635.5,3598.84
  Bottom Layer w10: v1(1961.39,3906) 1961.39,3904.65 1958.89,3902.15 1958.89,3822.86 1964.75,3817 2020.28,3817 2148.5,3688.78 2148.5,3612.21 2160.71,3600 2414.11,3600 2429,3600 2429,3609.2 2459,3609.2 2459,3595.84 2489,3595.84 2489,3600 2494,3600 2544.71,3600 2550.57,3605.86 2550.57,3618.5 2577.06,3645 v1(2581,3645)
R/W-1: J11.2 U1.39 | length 783.8
  Top Layer w10: U1.39@2075.39,363.7 2156.15,363.7 2158.65,361.2 v1(2160,361.2)
  Bottom Layer w10: v1(2160,361.2) 2161.35,361.2 2163.05,359.5 2194.32,359.5 2643.82,809 2656,809 2652.34,812.66 J11.2@2652.34,822.7
R/W-2: J22.4 U2.39 | length 718
  Top Layer w10: v1(3508,2805) 3510,2803 U2.39@3510,2725
  Bottom Layer w10: J22.4@2900.34,2876.2 2907.54,2869 2972,2869 2999.86,2841.14 3351.86,2841.14 3353,2840 3473,2840 v1(3508,2805)
R/W-3: J22.24 U3.39 | length 755.8
  Top Layer w10: U3.39@3510,1655 3510,1703.15 3511.5,1704.65 v1(3511.5,1707)
  Bottom Layer w10: J22.24@2900.34,1876.2 2906.54,1870 3380.82,1870 3514.77,1736.05 3514.77,1729.59 3515.12,1729.24 3515.12,1716.3 3512.46,1713.64 3512.46,1707.96 v1(3511.5,1707)
R/W-4: J?.4 U4.39 | length 975.2
  Top Layer w10: v1(1503.76,3661) 1623.39,3661 U4.39@1625.39,3663
  Bottom Layer w10: J?.4@855.64,3233 859,3236.36 859,3283 1237,3661 v1(1503.76,3661)
RESET: J11.5 U1.37 U2.37 U3.37 U4.37 | length 8340.6
  Top Layer w10: v1(1533,3706) 1533.96,3705.04 1537.49,3705.04 1537.6,3704.94 1595.54,3704.94 1597.47,3703 1624.39,3703 U4.37@1625.39,3702 ; U1.37@2075.39,324.7 2087,324.7 2088,325.7 2089,324.7 2123.36,324.7 2129.36,318.7 v1(2169.35,318.7) ; J11.5@2449,918 2452.34,921.34 J11.5@2452.34,922.7 ; U3.37@3549,1655 3550,1656 3550,1696 3558.81,1704.81 3558.81,1718.63 v1(3559.77,1719.59) ; U2.37@3549,2725 3549,2776.82 3564,2791.82 v1(3564,2804)
  Bottom Layer w10: v1(1533,3706) 1534.35,3706 1541.35,3699 1554,3699 1580,3673 1580,3312 1589,3303 2959,3303 2976,3286 2976,2931 3036.87,2870.13 3507.69,2870.13 3570.6,2807.22 3570.6,2804 v1(3564,2804) ; v1(2169.35,318.7) 2184.19,318.7 2615.49,750 2934,750 2968,784 2968,978 ; J11.5@2452.34,922.7 2452.34,986.67 2458.2,992.53 2840.74,992.53 cw(c2840.74,879.1) 2896.27,978 2968,978 ; v1(3559.77,1719.59) 3558.81,1718.63 3558.81,1709.81 3519,1670 3013,1670 2968,1625 2968,978 ; v1@3560.15,1719.59 3560.15,1747.85 3400.15,1907.85 3000.71,1907.85 2994.85,1913.71 2994.85,2745.85 3019,2770 3552.87,2770 3561,2778.13 v1@3561,2801
sync: J11.7 U1.36 U2.36 U3.36 U4.36 | length 8244.8
  Top Layer w10: 1582.99,3722 U4.36@1625.39,3722 ; U1.36@2075.39,304.7 2086.3,304.7 2087,304 2087.7,304.7 2144.15,304.7 2152.65,296.2 v1(2154,296.2) ; J11.7@2352.34,922.7 2404.04,871 2431.34,871 2432.04,871.7 2721.46,871.7 2728.04,865.11 2728.04,728.46 v1(2729,727.5) ; U3.36@3569,1655 3569,1693.76 v1(3584.74,1709.5) ; U2.36@3569,2725 3570,2726 3570,2754.64 3584.75,2769.39 3584.46,2769.68 3584.46,2779.64 v1(3583.5,2780.59)
  Bottom Layer w10: v1(1577.62,3727.44) 1578.57,3726.48 1582.11,3726.48 1583.52,3725.07 1588.91,3725.07 1594.77,3719.21 1594.77,3322.79 1600.63,3316.94 2971.06,3316.94 2991.85,3296.15 2991.85,2934.85 3042.65,2884.06 3515.76,2884.06 3586.5,2813.32 3586.5,2783.59 v1(3583.5,2780.59) ; v1(2154,296.2) 2182.2,296.2 2297.93,411.93 2297.93,412.74 2340.63,455.43 2613.2,728 v1@2726.69,728 ; v1(2729,727.5) 2935.5,727.5 2985,777 2985,1616.06 3025,1656.06 3531.3,1656.06 v1(3584.74,1709.5) 3584.74,1752.26 3415,1922 3024,1922 3010,1936 3010,2736.06 3030,2756.06 3571.88,2756.06 3587.91,2772.09
pads on no net: Amo4.5 Amo4.9 Amo4.12 Amp1.5 Amp1.9 Amp1.12 Amp2.5 Amp2.9 Amp2.12 Amp3.5 Amp3.9 Amp3.12 J11.9 J11.11 J11.13 J11.15 J11.17 J11.19 J11.21 J11.25 J11.27 J11.29 J11.31 J11.33 J11.35 J11.36 J11.37 J11.38 J11.39 J11.40 J22.1 J22.21 J?.5 J?.6 J?.7 J?.9 J?.11 J?.13 J?.15 J?.17 J?.19 J?.21 J?.23 J?.25 J?.27 J?.29 J?.31 J?.33 J?.35 J?.37 J?.39 J?.40 U1.21 U1.22 U1.25 U1.26 U2.21 U2.22 U2.25 U2.26 U3.21 U3.22 U3.25 U3.26 U4.21 U4.22 U4.25 U4.26 VR1.1 VR1.3 VR1.5 VR1.7 VR1.8
copper on no net: | length 10173.3
  Top Layer w10: v1(1882.5,3907) 1882.5,3904.33 1898.39,3888.43 1898.39,3856.61 1899.39,3855.61 ; 1899.39,3858 1899.39,3855.61 ; 1900,3855 1899.39,3855.61 ; v1(1911.08,3908.65) 1912.04,3907.69 1912.04,3894.5 1918.39,3888.14 1918.39,3859 1919.39,3858 ; 3695,1362 3696,1361 3705,1361 ; 3705,1440 3749,1440 3753.04,1435.96 3764.04,1435.96 v1(3765,1435) ; 3705,1460 3706,1461 v1(3761,1461)
  Top Layer w50: 2836,866 2840.74,870.74 2840.74,879.1 2853.9,879.1 2858,875
  Bottom Layer w10: v1(1882.5,3907) 1891,3898.5 1891,3737 2109.59,3518.41 2109.59,3454.77 2122.77,3441.59 2186.41,3441.59 2296.5,3331.5 2976.21,3331.5 3005.79,3301.92 3005.79,2960.21 3068,2898 3531.07,2898 3606,2823.07 3606,2759 3587,2740 3051.86,2740 3046,2734.14 3046,1946.86 3051.86,1941 3422,1941 3609,1754 3609,1701 3665,1645 3665,1448 3678,1435 v1(3765,1435) ; v1(1911.08,3908.65) 1911.08,3855.54 1910,3854.46 1910,3774 2317,3367 2585.18,3367 2594.68,3376.5 2613.32,3376.5 2622.82,3367 2960.42,3367 3019.73,3307.69 3019.73,2977.07 3084.86,2911.94 3536.84,2911.94 3538.78,2910 3540,2910 3619.94,2830.06 3619.94,2753.23 3607,2740.29 3607,2731 3597,2721 3065.79,2721 3059.94,2715.14 3059.94,1964.92 3067.86,1957 3427,1957 3626,1758 3626,1709 3678.94,1656.06 3678.94,1474.06 3692,1461 v1(3761,1461)

## Polygon pours and split planes (outlines as drawn)
GND on Top Layer "GND_L01_P001" (solid, remove dead copper, pour order 1): 3937,3937 3937,0 0,0 0,3937
GND on Top Layer "GND_L01_P000" (solid, remove dead copper, pour order 0): 0,3937
GND on Bottom Layer "GND_L02_P003" (solid, remove dead copper, pour order 3): 0,3937 3937,3937 3937,0 0,0

## Silkscreen, mask and mechanical layers (free items; w line width, h text height)
Mechanical 7:
  lines w1: 1.74,768.1 1.74,3287.79 2954.5,3287.79 2954.5,768.1 1.74,768.1
Mechanical 11:
  lines w1: -7.26,1004.1 -7.26,754.1 242.74,754.1 ; -5.26,3049.1 -5.26,3299.1 244.74,3299.1 ; 2715.74,754.1 2965.74,754.1 2965.74,1004.1 2715.74,1004.1 ; 2715.74,3049.1 2715.74,3299.1 2965.74,3299.1 2965.74,3049.1 2715.74,3049.1
Mechanical 12:
  region: -5.26,3049.1 244.74,3049.1 244.74,3299.1 -5.26,3299.1
  region: 2715.74,3049.1 2965.74,3049.1 2965.74,3299.1 2715.74,3299.1
  region: 2715.74,754.1 2965.74,754.1 2965.74,1004.1 2715.74,1004.1
  region: -7.26,754.1 242.74,754.1 242.74,1004.1 -7.26,1004.1